# Altium PCB PCB_Hall-sensor.pcbdoc
Units mil, origin at the board's own origin, x right, y up, seen from the top; angles counter-clockwise.
Board outline 1660 x 1535 mil, 2 copper layers (Top Layer, Bottom Layer); 2 components, 8 nets, 6 pads, 0 vias.
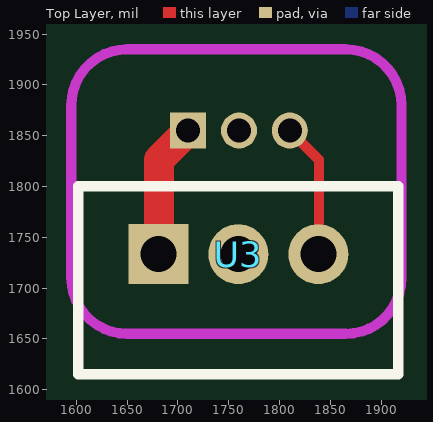
[diagram p0: Top Layer view]
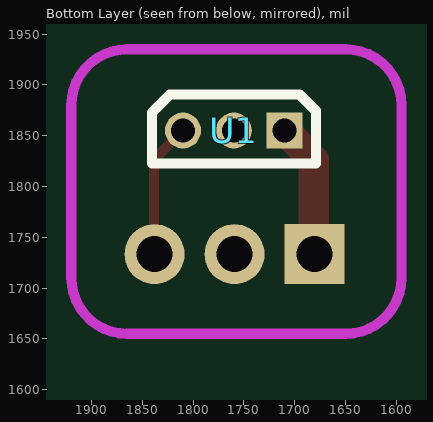
[diagram p1: Bottom Layer view, seen from below]

## Layer stack, top to bottom
Top Layer: signal copper (thickness not stored)
Dielectric: dielectric 12.6, FR-4, Dk 4.8
Bottom Layer: signal copper (thickness not stored)

## Board outline
2660,1000 1000,1000 1000,2535 2660,2535

## Components (designator, comment, footprint, x,y, rotation, side; value= is the part's Value field where it differs from the comment)
U1 "MS49E" TO-92S-3_L4.1-W1.7-P1.27-L 1760,1855 r180 bottom
U3 "WAFER-PH2.0-3PZZ-R62" CONN-TH_4P-P2.00_WAFER-PH2.0-3PZZ-R62 1759.33,1733.33 r0 top

## Footprints (in the part's own frame and the unit in brackets; to place one, negate y for a bottom-side part, rotate by r counter-clockwise, add the part's x,y. Pads: shape width x height; smd on the part's side, far side on the other; paste and mask are expansions set on the pad)
CONN-TH_4P-P2.00_WAFER-PH2.0-3PZZ-R62 [mm]
  rect 1.5x1.5 hole 0.9 paste+0 mask+0.05: 1(-2,0)
  round 1.5 hole 0.9 paste+0 mask+0.05: 2(0,0) 3(2,0)
  silkscreen extent -4,-3 4,1.7
TO-92S-3_L4.1-W1.7-P1.27-L [mm]
  rect 0.9x0.9 hole 0.6 paste+0 mask+0.051: 1(1.27,0)
  round 0.9 hole 0.6 paste+0 mask+0.051: 2(0,0) 3(-1.27,0)
  silkscreen extent -2.05,-0.82 2.05,0.9

## Nets (pads, with @x,y where several pads share a name; then routed paths per layer and width w, separated by ;. In a path a pad name is that pad's centre, name@x,y a point inside that pad or via, vN(x,y) a via of type N, cw(c..) or ccw(c..) an arc to the next point about the centre after c; other vN are vias at no path point)
GND: U1.2 U3.2
OUT: U1.3 U3.3 | length 141.9
  Top Layer w10: U1.3 1838.7,1826.3 U3.3@1838.7,1725
S$362: 
S$436: 
S$440: 
S$444: 
S$448: 
VCC: U1.1 U3.1 | length 141.9
  Top Layer w30: U3.1@1681.3,1725 1681.3,1826.3 U1.1

## Polygon pours and split planes (outlines as drawn)
GND on Bottom Layer (solid): 1500,2020 2110,2020 2110,2035 2160,2035 2160,1500 1540,1500
GND on Top Layer (solid): 1535.71,1585 1535,1555 1535,1585 1535.71,1585
GND on Top Layer (solid): 1995,1975 1995,1585 1535.71,1585 1545,1975 1995,1975

## Keep-outs
Keep-Out Layer:
  lines w10 net S$362: 1594.96,1710.04 ccw(c1650,1710.04) 1650,1655 ; 1595,1880 cw(c1650.04,1880) 1650.04,1935.04 ; 1864.96,1654.96 ccw(c1864.96,1710) 1920,1710 ; 1864.96,1935 cw(c1864.96,1879.96) 1920,1879.96